# Allegro board Shield_2.brd
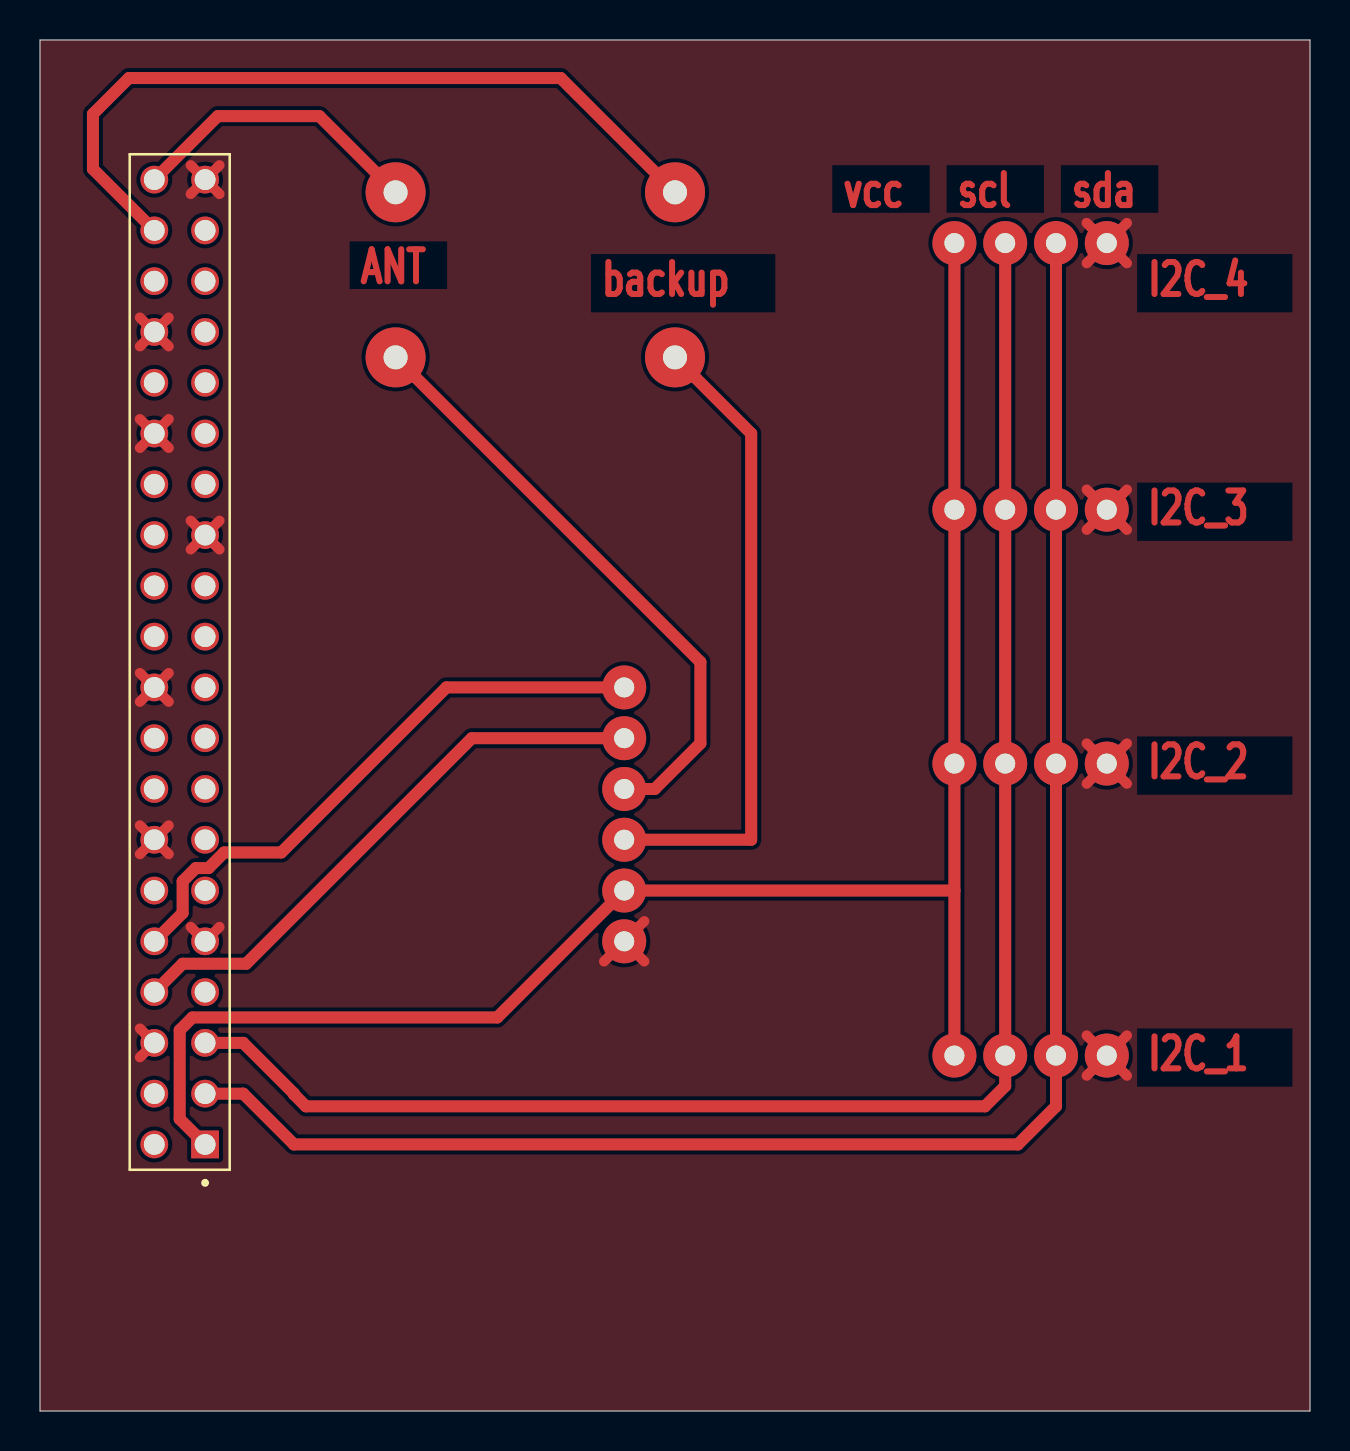
[diagram p0: board, top side]
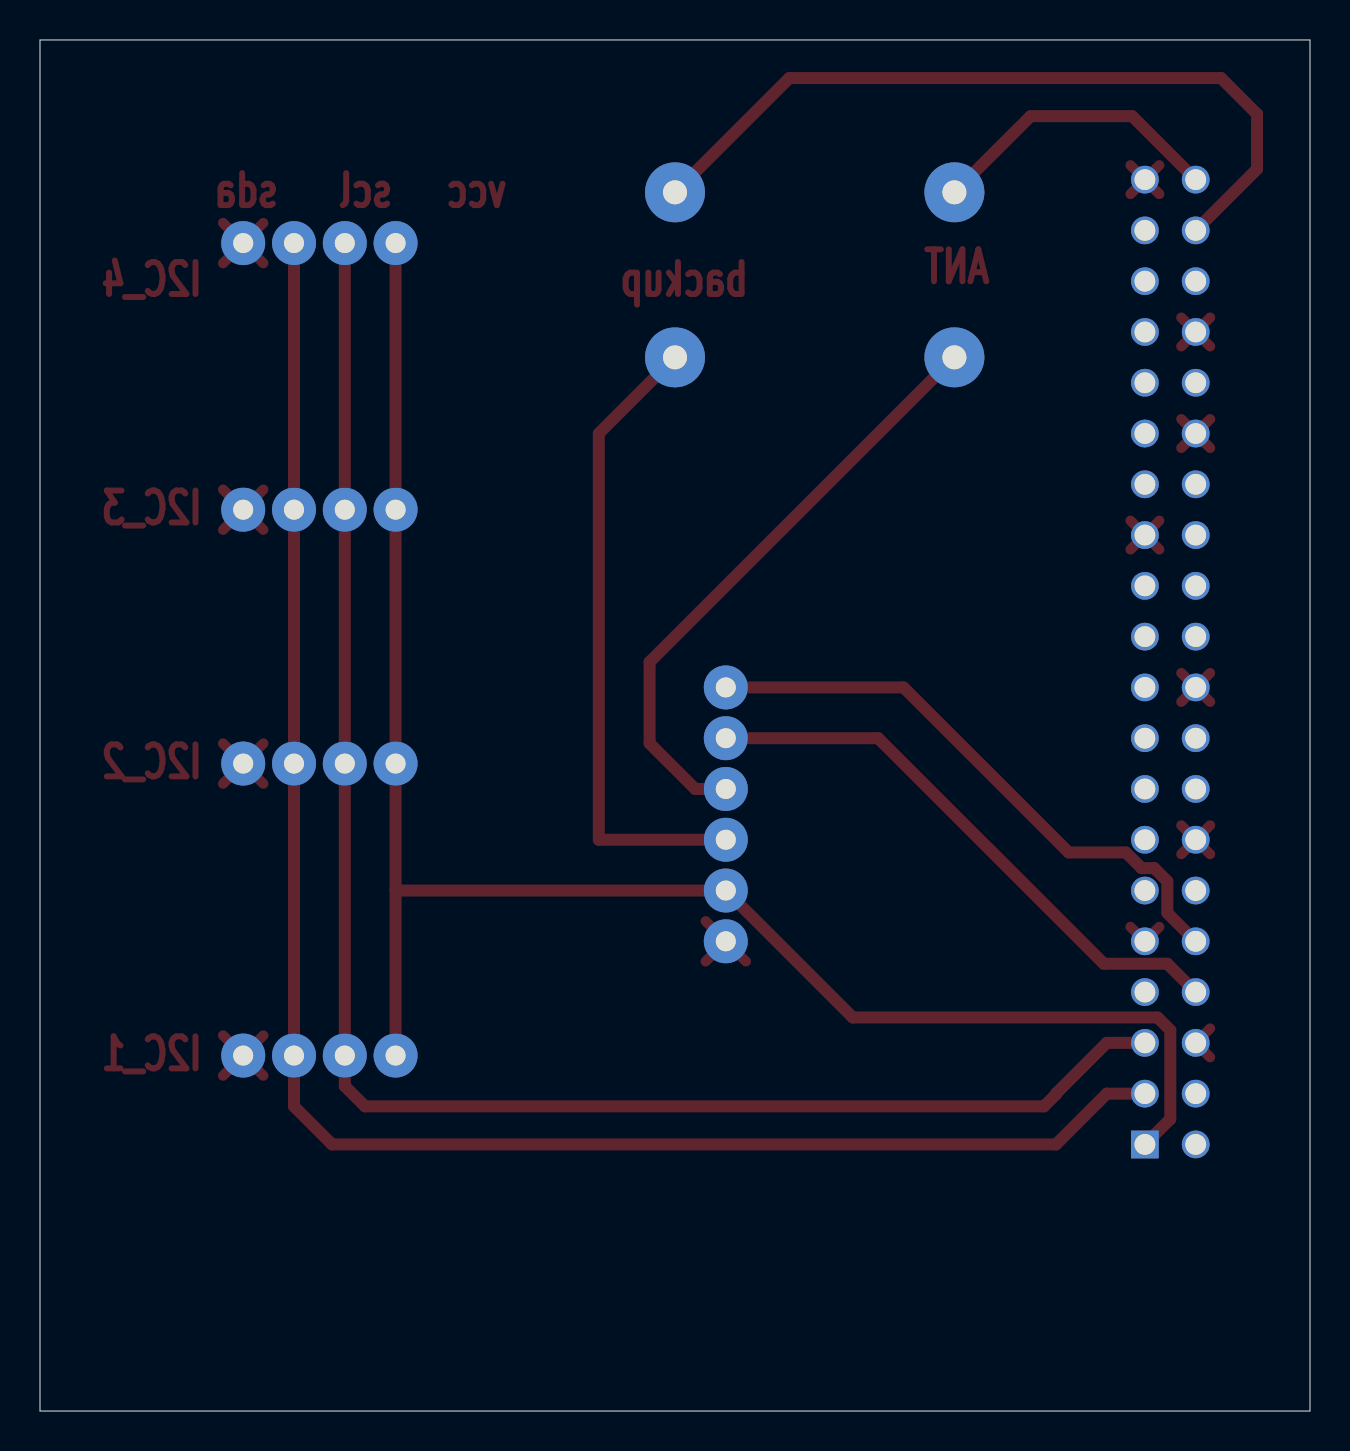
[diagram p1: board, bottom side, seen from below]

Outline 63.5 x 68.58 mm; copper layers: TOP, BOTTOM. Coordinates in mm from the lower left corner of the outline.
Outline path: 0,68.58 0,0 63.5,0 63.5,68.58 0,68.58

## Design rules (mm)
constraint set DEFAULT: min track width 0.6

## Placement (name value [footprint] x y rotation side)
ANT  CON1  [CON_01]  17.78 52.7 0 top
ANT_GPIO  CON1  [CON_01]  17.78 60.96 0 top
BU  CON1  [CON_01]  31.75 52.7 0 top
BU_GPIO  CON1  [CON_01]  31.75 60.96 0 top
GPS  GPS  [CON_06]  29.21 23.49 90 top
I2C_1  CON4  [CON_04]  53.34 45.08 180 top
I2C_2  CON4  [CON_04]  53.34 58.42 180 top
I2C_3  CON4  [CON_04]  53.34 32.38 180 top
I2C_4  CON4  [CON_04]  53.34 17.78 180 top
RASP  CON40A  [TE_2-828221-0]  8.26 13.34 90 top

## Library data of the parts
ANT ANT_GPIO BU BU_GPIO = CON1
GPS = CON6
I2C_1-I2C_4 = CON4
RASP = CON40A

## Footprints (pads in the part's own frame, mm; a bottom-side part is the same pattern mirrored in y, then rotated)
CON_01
  round 3 hole 1.2: 1(0,0)
CON_04
  round 2.2 hole 1: 1(0,0) 2(2.54,0) 3(5.08,0) 4(7.62,0)
CON_06
  round 2.2 hole 1: 1(0,0) 2(2.54,0) 3(5.08,0) 4(7.62,0) 5(10.16,0) 6(12.7,0)
TE_2-828221-0
  rect 1.39x1.39 hole 1.04: 1(0,0)
  round 1.39 hole 1.04: 2(0,2.54) 3(2.54,0) 4(2.54,2.54) 5(5.08,0) 6(5.08,2.54) 7(7.62,0) 8(7.62,2.54) 9(10.16,0) 10(10.16,2.54) 11(12.7,0) 12(12.7,2.54) 13(15.24,0) 14(15.24,2.54) 15(17.78,0) 16(17.78,2.54) 17(20.32,0) 18(20.32,2.54) 19(22.86,0) 20(22.86,2.54) 21(25.4,0) 22(25.4,2.54) 23(27.94,0) 24(27.94,2.54) 25(30.48,0) 26(30.48,2.54) 27(33.02,0) 28(33.02,2.54) 29(35.56,0) 30(35.56,2.54) 31(38.1,0) 32(38.1,2.54) 33(40.64,0) 34(40.64,2.54) 35(43.18,0) 36(43.18,2.54) 37(45.72,0) 38(45.72,2.54) 39(48.26,0) 40(48.26,2.54)

## Nets
5V: RASP.2
VCC: GPS.2 I2C_1.4 I2C_2.4 I2C_3.4 I2C_4.4 RASP.1
0: GPS.1 I2C_1.1 I2C_2.1 I2C_3.1 I2C_4.1 RASP.6 RASP.9 RASP.14 RASP.20 RASP.25 RASP.30 RASP.34 RASP.39
ANT: ANT.1 GPS.4
ANT_GPIO: ANT_GPIO.1 RASP.40
BACKUP: BU.1 GPS.3
BACKUP_GPIO: BU_GPIO.1 RASP.38
RX(GPS): GPS.6 RASP.10
SCL: I2C_1.3 I2C_2.3 I2C_3.3 I2C_4.3 RASP.5
SDA: I2C_1.2 I2C_2.2 I2C_3.2 I2C_4.2 RASP.3
TX(GPS): GPS.5 RASP.8
N15150: RASP.17

Pads without a net: RASP 4 7 11 12 13 15 16 18 19 21 22 23 24 26 27 28 29 31 32 33 35 36 37

## Routing (per net, layer and track width the routed paths; a pad name or vN(x,y) marks a point on that pad's centre or on a via; arc(x,y) is an arc through that point)
VCC: length 88.5
  TOP w0.6: 45.72,26.03 GPS.2 22.86,19.68 7.62,19.68 6.99,19.05 6.99,14.6 RASP.1 ; 45.72,26.03 I2C_3.4 I2C_1.4 I2C_2.4 ; 45.72,26.03 I2C_4.4
0: length 55.5
  TOP w0.508: RASP.30 6.43,49.61 ; RASP.30 5,49.61 ; RASP.30 6.43,48.18 ; RASP.30 5,48.18 ; 5,36.91 RASP.20 ; RASP.20 5,35.48 ; RASP.20 6.43,36.91 ; RASP.20 6.43,35.48 ; RASP.34 6.43,53.26 ; RASP.34 6.43,54.69 ; RASP.34 5,54.69 ; RASP.34 5,53.26 ; I2C_4.1 54.35,18.79 ; I2C_4.1 52.33,18.79 ; I2C_4.1 52.33,16.77 ; I2C_4.1 54.35,16.77 ; 52.33,46.09 I2C_1.1 ; I2C_1.1 54.35,46.09 ; I2C_1.1 52.33,44.08 ; I2C_1.1 54.35,44.08 ; 7.54,44.53 RASP.25 ; RASP.25 7.54,43.1 ; RASP.25 8.97,43.1 ; RASP.25 8.97,44.53 ; RASP.39 8.97,62.31 ; RASP.39 8.97,60.88 ; RASP.39 7.54,62.31 ; RASP.39 7.54,60.88 ; 28.2,22.49 GPS.1 ; GPS.1 30.22,22.49 ; GPS.1 30.22,24.5 ; 5,27.86 RASP.14 ; RASP.14 6.43,29.29 ; RASP.14 5,29.29 ; RASP.14 6.43,27.86 ; I2C_2.1 54.35,59.43 ; I2C_2.1 52.33,59.43 ; I2C_2.1 52.33,57.41 ; I2C_2.1 54.35,57.41 ; 8.97,24.21 RASP.9 7.54,24.21 ; 5,17.7 RASP.6 5,19.13 ; I2C_3.1 54.35,31.38 ; I2C_3.1 52.33,33.39 ; I2C_3.1 52.33,31.38 ; I2C_3.1 54.35,33.39
ANT: length 30.4
  TOP w0.6: ANT.1 33.02,37.47 33.02,33.4 30.74,31.11 GPS.4
ANT_GPIO: length 15
  TOP w0.6: ANT_GPIO.1 13.97,64.77 8.89,64.77 RASP.40
BACKUP: length 32.1
  TOP w0.6: GPS.3 35.56,28.57 35.56,48.89 BU.1
BACKUP_GPIO: length 39.3
  TOP w0.6: BU_GPIO.1 26.04,66.67 4.45,66.67 2.65,64.88 2.65,62.12 RASP.38
RX(GPS): length 29.7
  TOP w0.6: 29.21,36.2 20.32,36.2 12.06,27.94 9.21,27.94 8.42,27.16 7.79,27.16 7.13,26.5 7.13,24.91 RASP.10
SCL: length 83.9
  TOP w0.6: I2C_2.3 I2C_1.3 I2C_3.3 I2C_4.3 48.26,16.25 47.25,15.24 13.3,15.24 12.7,15.84 12.7,15.88 10.16,18.41 RASP.5
SDA: length 87.6
  TOP w0.6: RASP.3 10.16,15.88 12.7,13.34 48.9,13.34 50.8,15.24 I2C_4.2 I2C_3.2 I2C_1.2 I2C_2.2
TX(GPS): length 28.8
  TOP w0.6: RASP.8 7.13,22.37 10.31,22.37 21.59,33.66 GPS.5

## Copper pours and planes (outline as drawn; the poured copper is in the pictures)
0 on TOP: 0,68.58 0,0 63.5,0 63.5,68.58

## Text on the board
TOP: ANT | backup | vcc | scl | sda | I2C_4 | I2C_3 | I2C_2 | I2C_1
